# Altium PCB RFID_CC1101_869MHz.PcbDoc (part 1 of 2)
Units mil, origin at the board's own origin, x right, y up, seen from the top; angles counter-clockwise.
Board outline 1670 x 2720 mil, 4 copper layers (Top Layer, GND Plane, POWER Plane, Bottom Layer), stack 16.312 mil thick; 110 components, 80 nets, 353 pads, 256 vias.
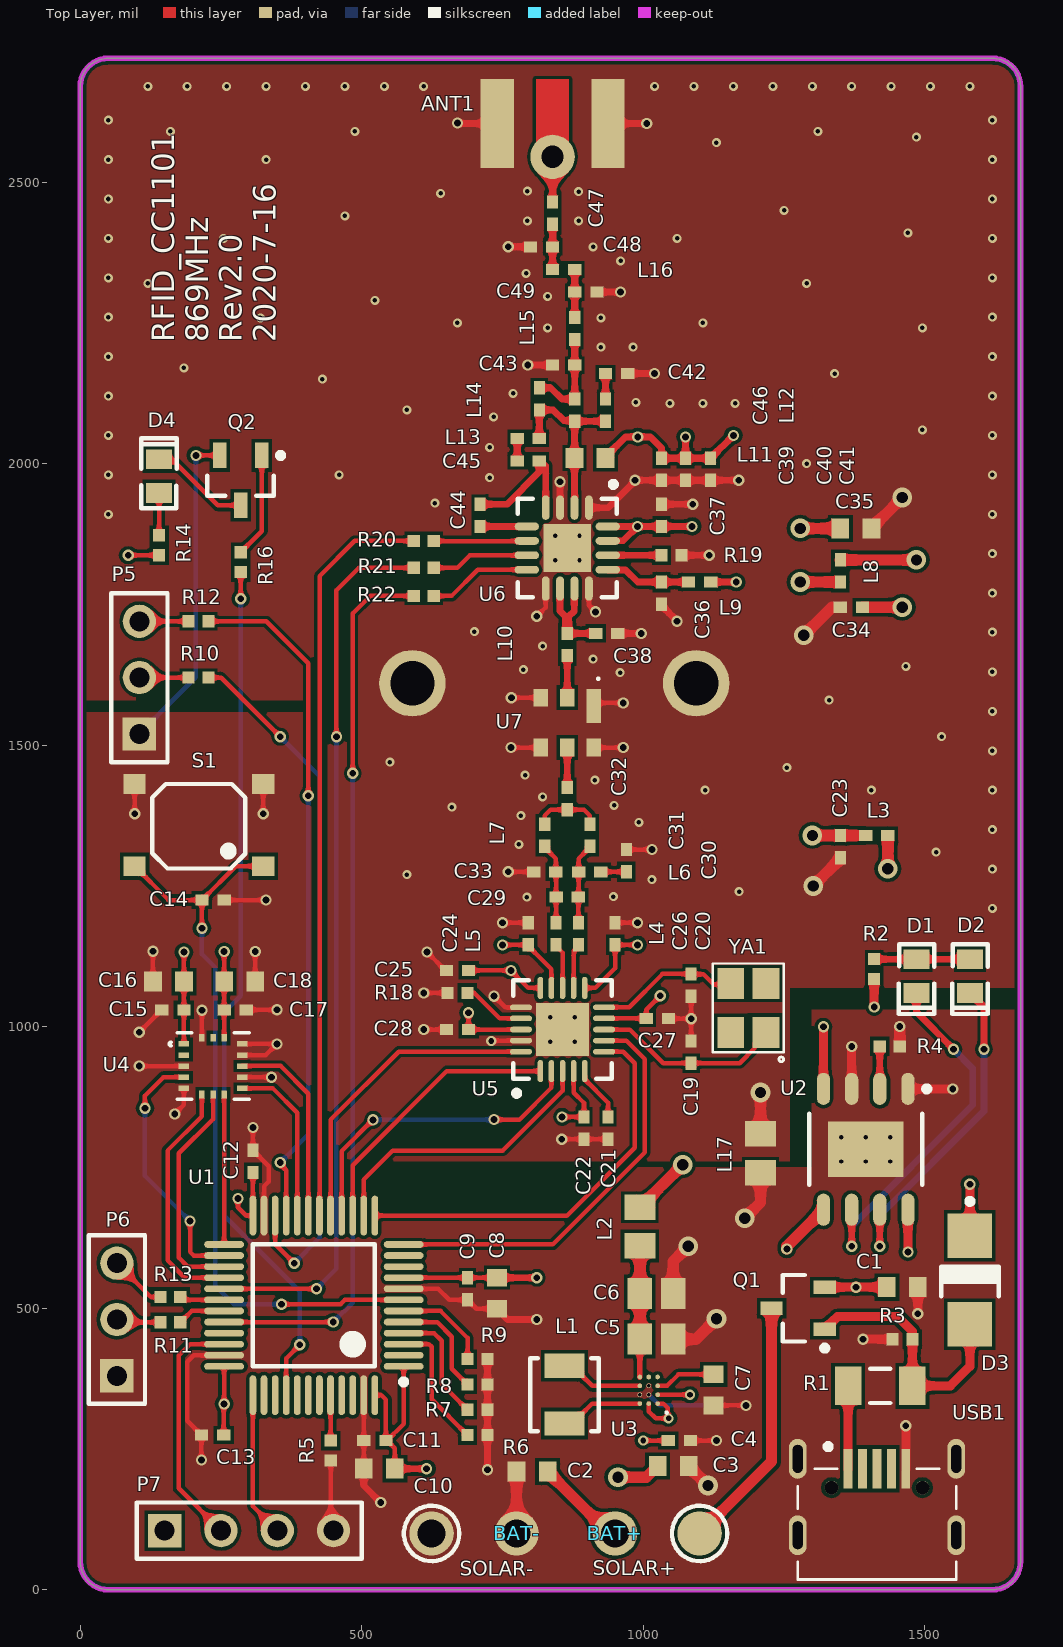
[diagram p0: Top Layer view]
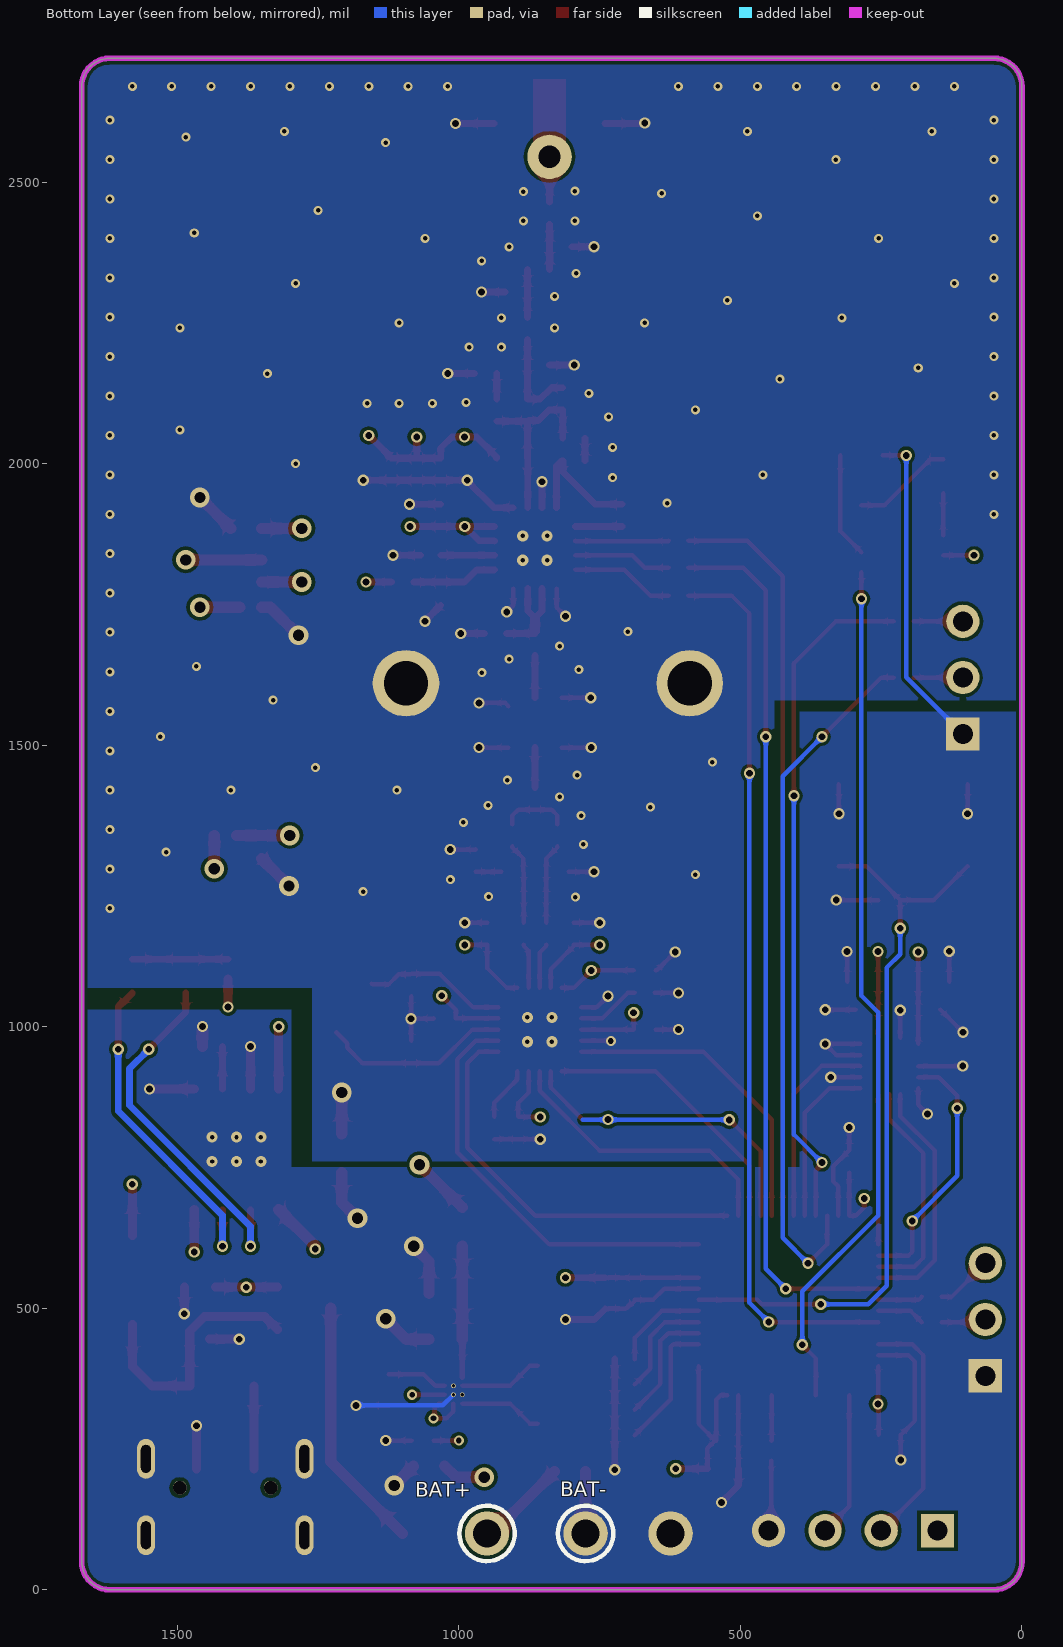
[diagram p1: Bottom Layer view, seen from below]
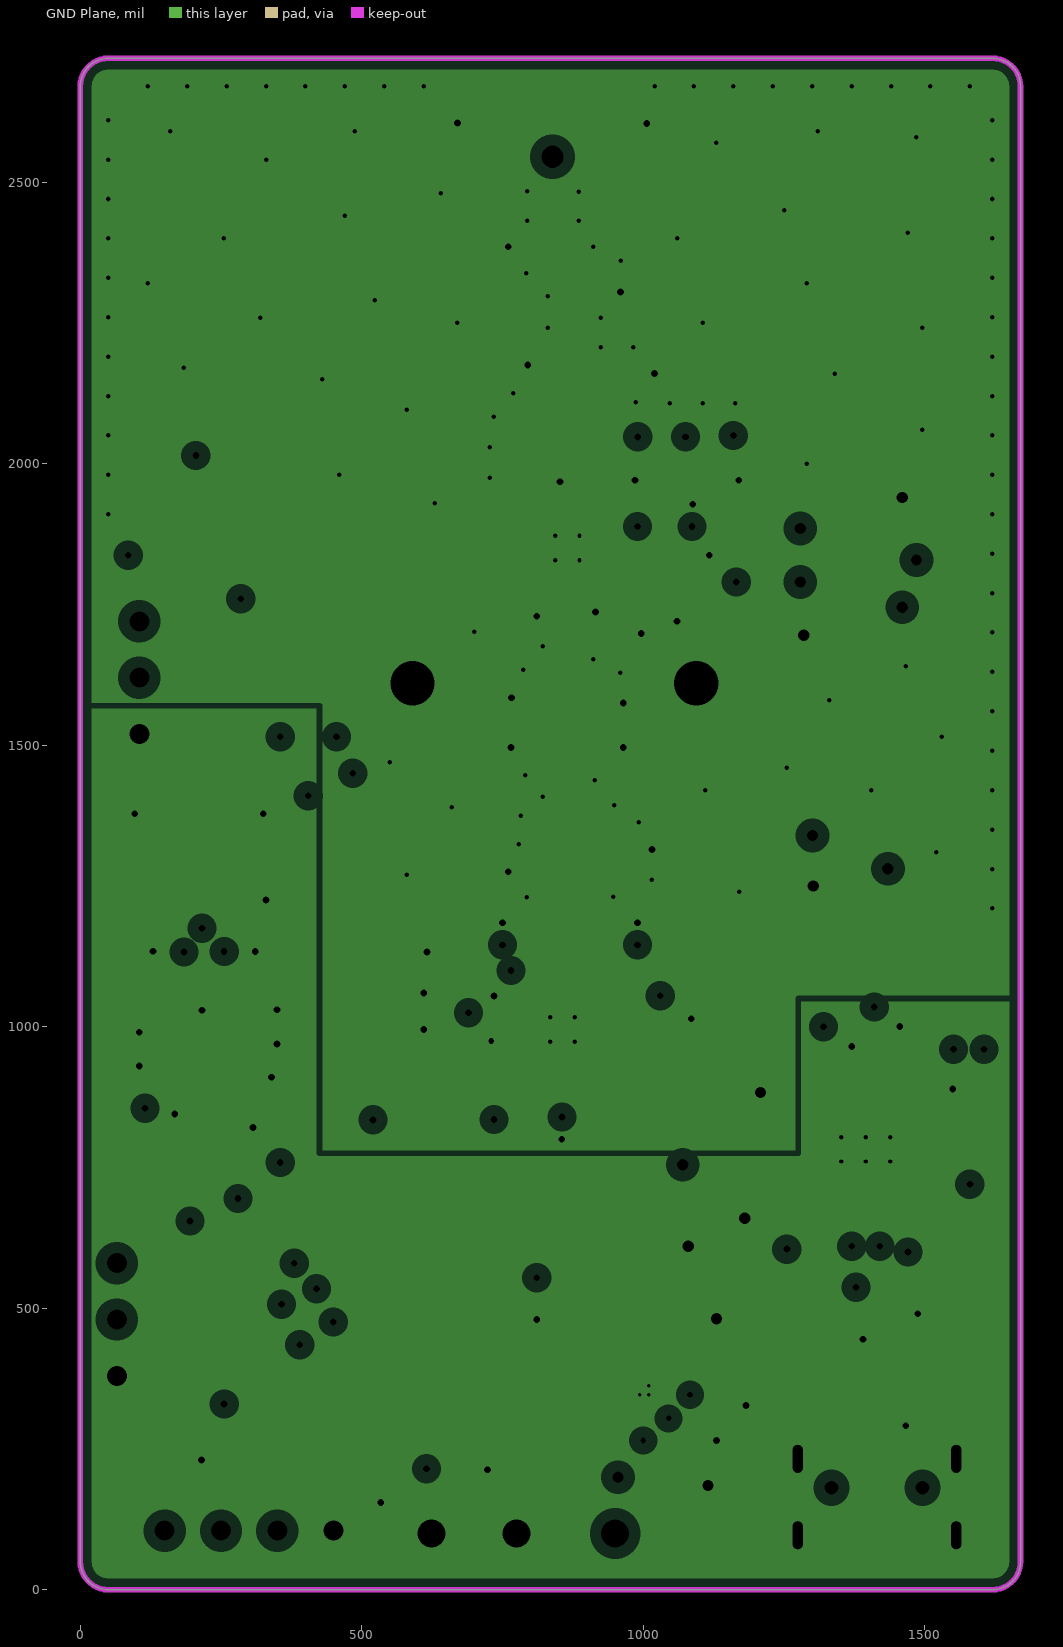
[diagram p2: GND Plane, clearances drawn from the general rule]
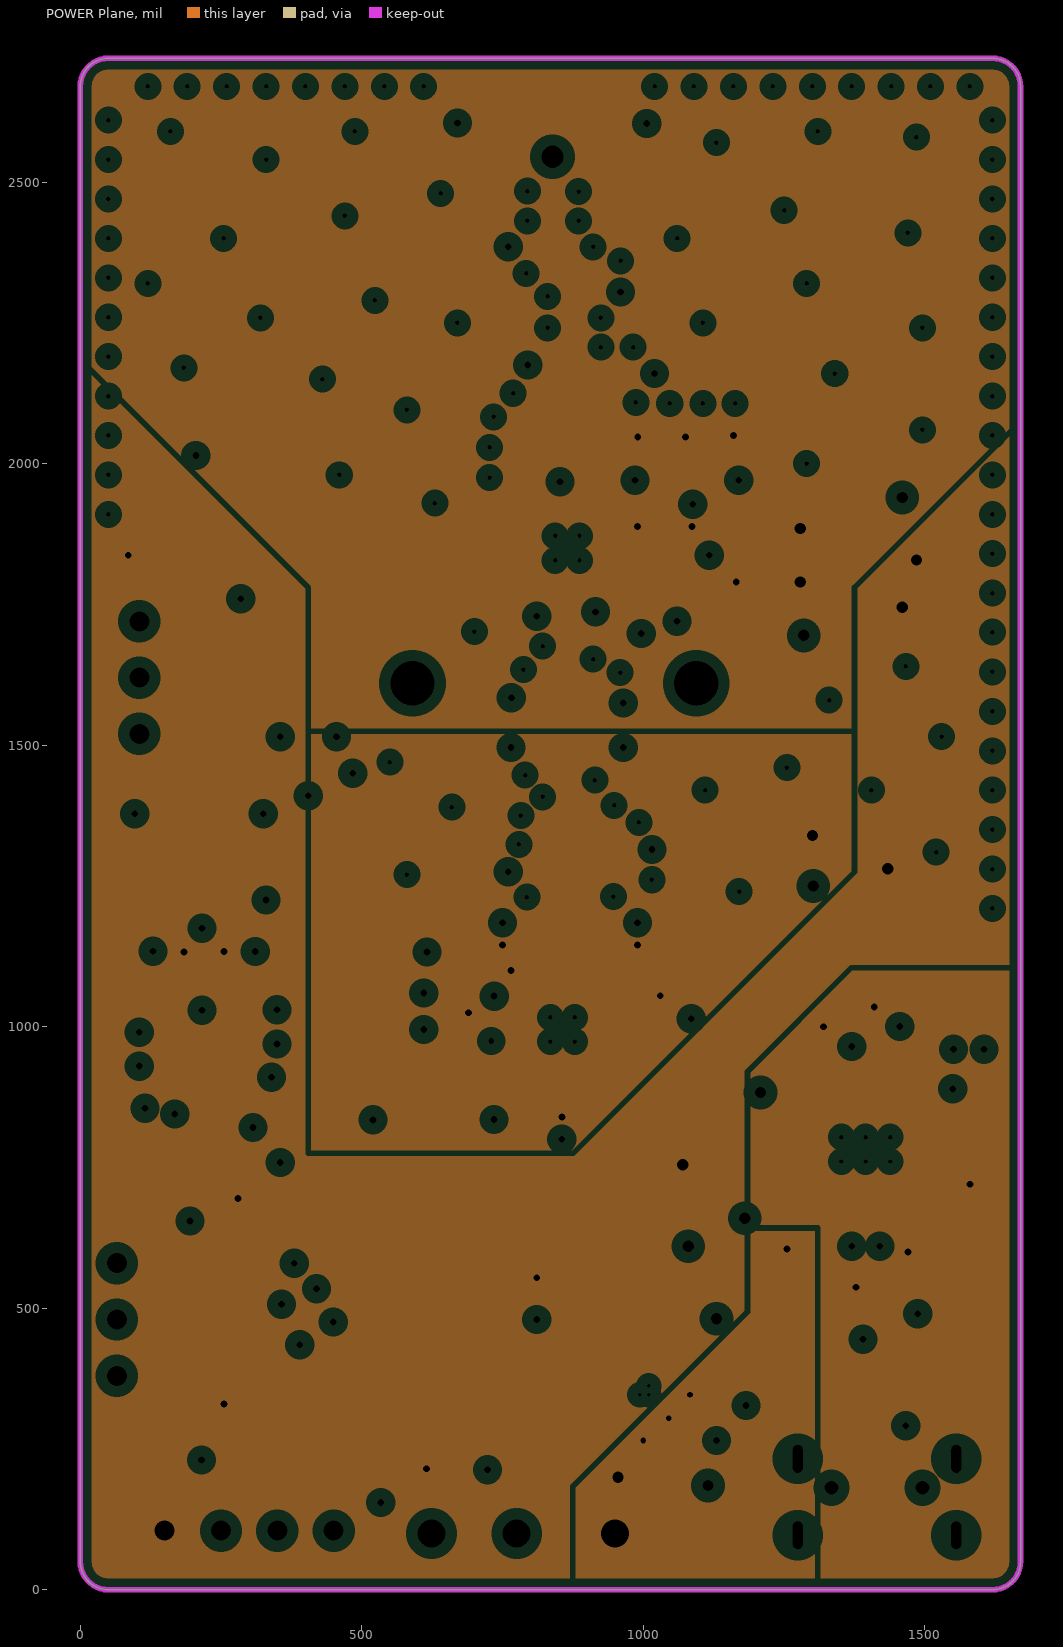
[diagram p3: POWER Plane, clearances drawn from the general rule]

## Layer stack, top to bottom
Top Solder: solder mask 0.4, Solder Resist, Dk 3.5
Top Layer: signal copper 1.3779
Dielectric 1: core 4, Core-009, Dk 4.5
GND Plane: plane copper 1.3779, net (Multiple Nets)
Dielectric 3: prepreg 2.8, PP-006, Dk 4.1
POWER Plane: plane copper 1.3779, net (Multiple Nets)
Dielectric 2: core 4, Core-009, Dk 4.5
Bottom Layer: signal copper 1.3779
Bottom Solder: solder mask 0.4, Solder Resist, Dk 3.5

## Board outline
0,50 0,2670 cw(c50,2670) 50,2720 1620,2720 cw(c1620,2670) 1670,2670 1670,50 cw(c1620,50) 1620,0 50,0 cw(c50,50)

## Design rules (kind name [scope] priority, off if disabled: settings)
Clearance Clearance_6mil [(IsPad and InComponent('U1')) or (IsPad and InComponent('U3')) or (IsPad and InComponent('U4')) or (IsPad and InComponent('U5')) or (IsPad and InComponent('U6')) or (IsPad and InComponent('USB1'))] p1: gap=6 ignorepadtopadclearanceinfootprint=TRUE
Clearance [All] p2: gap=6 ignorepadtopadclearanceinfootprint=TRUE
HoleToHoleClearance [All] p1: gap=8 allowstackedmicrovias=TRUE
MinimumSolderMaskSliver [All] p1: minsoldermaskwidth=1
PlaneClearance [All] p1: clearance=20
PlaneConnect [All] p1: planeconnectstyle=Direct reliefexpansion=20 reliefentries=4 reliefconductorwidth=10 reliefairgap=10
PolygonConnect [All] p1: connectstyle=Direct reliefconductorwidth=10 reliefentries=4 polygonreliefangle="90 Angle" airgapwidth=10
RoutingVias [All] p1: holewidth=12 width=20 viastyle="Through Hole" minholewidth=6 minwidth=14 maxholewidth=28 maxwidth=50
SilkToSilkClearance [All] p1: silktosilkclearance=8
SilkToSolderMaskClearance [IsPad] p1: minsilkscreentomaskgap=3 clearancetoexposedcopper=TRUE
SolderMaskExpansion [All] p1: expansion=4
UnRoutedNet [All] p1: checkbadconnections=TRUE
Width Width_PW [InNet('BAT+') or InNet('SOLAR+') or InNet('VCC') or InNet('VCC_3V3') or InNet('VCC_CC1101') or InNet('VCC_CC1190')] p1: maxlimit=50 minlimit=8 preferedwidth=20
Width [All] p2: maxlimit=50 minlimit=8 preferedwidth=8
23 further rules are at their usual default settings.

## Classes and differential pairs
component class Power: BAT+ BAT- C1 C2 C3 C4 C5 C6 C7 D1 D2 D3 L1 L17 Q1 R1 R2 R3 R4 SOLAR+ SOLAR- U2 U3 USB1
component class MEMS&RF: ANT1 C15 C16 C17 C18 C19 C20 C21 C22 C23 C24 C25 C26 C27 C28 C29 C30 C31 C32 C33 C34 C35 C36 C37 C38 C39 C40 C41 C42 C43 C44 C45 C46 C47 C48 C49 L3 L4 L5 L6 L7 L8 L9 L10 L11 L12 L13 L14 L15 L16 R18 R19 U4 U5 U6 U7 YA1
component class MCU: C8 C9 C10 C11 C12 C13 C14 D4 P5 P6 P7 Q2 R5 R6 R7 R8 R9 R10 R11 R12 R13 R14 R16 R20 R21 R22 S1 U1

## Components (designator, comment, footprint, x,y, rotation, side; value= is the part's Value field where it differs from the comment)
ANT1 "ANT" SMB-xg 838.9,2545 r90 top
BAT+ "BAT+" surface_pad#1 950,100 r180 top
BAT- "BAT-" SURFACE_PAD 775,100 r180 top
C1 "10uF" 1608[0603] 1460,537.4 r180 top
C2 "10uF" 1608[0603] 802.56,210 r0 top
C3 "10uF" 1608[0603] 1052.99,220 r180 top
C4 "100nF" 0402 1064.21,265 r180 top
C5 "22uF" C0805 1023.46,445 r180 top
C6 "22uF" C0805 1023.46,526.26 r180 top
C7 "1uF" 1608[0603] 1125,355 r90 top
C8 "1uF" 1608[0603] 739.96,526.65 r90 top
C9 "100nF" 0402 687.8,534.53 r90 top
C10 "10uF" 1608[0603] 531.14,215 r0 top
C11 "100nF" 0402 523.27,265 r180 top
C12 "100nF" 0402 306.73,760.63 r90 top
C13 "100nF" 0402 235,275 r180 top
C14 "100nF" 0402 235.86,1225 r0 top
C15 "100nF" 0402 164.5,1030 r0 top
C16 "1uF" 1608[0603] 156.63,1080 r180 top
C17 "100nF" 0402 275.24,1030 r0 top
C18 "1uF" 1608[0603] 283.11,1080 r180 top
C19 "12pF" 0402 1085,955 r270 top
C20 "15pF" 0402 1085,1074 r90 top
C21 "100nF" 0402 937.32,820 r90 top
C22 "100nF" 0402 894.68,820 r90 top
C23 "1uF" 0402 1350,1320 r270 top
C24 "100nF" 0402 795.75,1165 r90 top
C25 "100nF" 0402 670,1100 r180 top
C26 "100nF" 0402 950,1165 r90 top
C27 "100nF" 0402 1025,1014.68 r0 top
C28 "100nF" 0402 670,995 r180 top
C29 "1pF" 0402 865,1230 r0 top
C30 "100pF" 0402 970,1295 r90 top
C31 "1.5pF" 0402 905,1340 r90 top
C32 "47pF" 0402 865,1405 r90 top
C33 "1.5pF" 0402 825,1275 r0 top
C34 "220pF" 0402 1369.69,1745 r0 top
C35 "10uF" 1608[0603] 1377.56,1885 r180 top
C36 "18pF" 0402 1032.28,1770 r270 top
C37 "33pF" 0402 1032.28,1908.07 r270 top
C38 "2.7pF" 0402 935,1698.5 r180 top
C39 "1uF" 0402 1032.28,1990 r90 top
C40 "47pF" 0402 1075,1990 r90 top
C41 "1nF" 0402 1119.69,1990 r90 top
C42 "5.6pF" 0402 952.6,2160 r180 top
C43 "5.6pF" 0402 858.58,2175 r0 top
C44 "12pF" 0402 710,1908.07 r90 top
C45 "12pF" 0402 795.75,2005 r0 top
C46 "2.2pF" 0402 878.27,2095 r270 top
C47 "47pF" 0402 838.9,2445 r270 top
C48 "9.1pF" 0402 819.21,2385 r0 top
C49 "15pF" 0402 897.95,2304.69 r180 top
D1 "Green" 0603/K 1485,1120 r270 top
D2 "Red" 0603/K 1580,1120 r270 top
D3 "SS24S" ONSC-SMA-2-403D-02_V 1580,550 r270 top
D4 "Green" 0603/K 140,1947.68 r90 top
L1 "2.2μH ±20% at 100kHz" INDP3230X10N 860,346.42 r90 top value="2.2μH ±20% at 100k"
L2 "220 Ω@100MHz" RESC2012X07N 993.94,645 r90 top
L3 "1000Ω@100MHz" 0402 1414.69,1339.69 r180 top
L4 "12nH" 0402 885,1165 r90 top
L5 "12nH" 0402 845,1165 r90 top
L6 "18nH" 0402 905,1275 r0 top
L7 "18nH" 0402 825,1340 r90 top
L8 "11nH" 0402 1350,1809.37 r270 top
L9 "1.5nH" 0402 1100,1789.68 r0 top
L10 "8.2nH" 0402 865,1678.82 r90 top
L11 "15nH" 1608[0603] 905.35,2010 r0 top
L12 "1.5nH" 0402 932.91,2095 r270 top
L13 "10nH" 0402 795.75,2045 r0 top
L14 "2.2nH" 0402 815.43,2115 r270 top
L15 "2.2nH" 0402 878.27,2240 r270 top
L16 "4.1nH" 0402 858.58,2344.69 r0 top
L17 "220 Ω@100MHz" RESC2012X07N 1208,775 r90 top
P5 "Header 3" HDR1X3 105,1520 r90 top
P6 "Header 3" HDR1X3 65,380 r90 top
P7 "Header 4" HDR1X4 150,105 r0 top
Q1 "Si2301CDS" SOT95P237X112-3N 1275,500 r180 top
Q2 "MMS8050-L" ? 285,1970.31 r270 top
R1 "0.4" RESC3216X07N 1420.91,362.17 r0 top
R2 "1k" RESC1005X04N 1410,1102.28 r90 top
R3 "10k" RESC1005X04N 1460.28,445 r0 top
R4 "1.2k" RESC1005X04N 1437.72,965 r180 top
R5 "10k" RESC1005X04N 445,247.28 r270 top
R6 "10k" RESC1005X04N 705.51,274.69 r180 top
R7 "10k" RESC1005X04N 705.51,319.69 r180 top
R8 "10k" RESC1005X04N 705.51,364.69 r180 top
R9 "10k" RESC1005X04N 705.51,409.69 r180 top
R10 "33" RESC1005X04N 210,1620 r180 top
R11 "33" RESC1005X04N 160,475 r180 top
R12 "33" RESC1005X04N 210,1720 r0 top
R13 "33" RESC1005X04N 160,520 r0 top
R14 "10k" RESC1005X04N 140,1855 r270 top
R16 "1k" RESC1005X04N 285,1825 r90 top
R18 "56k" RESC1005X04N 670,1060 r0 top
R19 "3.3k" RESC1005X04N 1050,1837.2 r0 top
R20 "10k" RESC1005X04N 610,1862.8 r0 top
R21 "10k" RESC1005X04N 610,1815 r180 top
R22 "10k" RESC1005X04N 610,1765 r180 top
S1 "DPST-4" DPST 325,1285 r180 top
SOLAR+ "SOLAR+" surface_pad#2 1100,100 r0 top
SOLAR- "SOLAR-" surface_pad#1 624,100 r0 top
U1 "STM32L051C8T6" STM-LQFP48_N 415,505 r180 top
U2 "TP4056" ESOP-9N 1395,782.28 r270 top
U3 "MP28160" CSP-12 1009.68,354.29 r180 top
U4 "ADXL362BCCZ" LGA_CC-16-4 235.86,930 r0 top
U5 "CC1101" QFN50P400X400X100_HS-21N 856.61,995 r90 top
U6 "CC1190" QFN65P400X400X100_HS-17N 865,1850 r270 top
U7 "B39871B3725U410" DCC6C 865,1540 r270 top
USB1 "Micro-USB" USB_Micro_5P4J 1415,18 r270 top
YA1 "27MHz" XTAL-SMT-4P 1218,990 r90 top

## Footprints (in the part's own frame and the unit in brackets; to place one, negate y for a bottom-side part, rotate by r counter-clockwise, add the part's x,y. Pads: shape width x height; smd on the part's side, far side on the other; paste and mask are expansions set on the pad)
0402 [mm] "Chip Capacitor, Body 1.0x0.5mm, IPC High Density"
  rect 0.6x0.5 smd: 1(-0.5,0) 2(0.5,0)
  body extent -0.55,-0.3 0.55,0.3, height 1.3
0603/K [mil]
  rect 35x46 smd: A(0,0) K(60,0)
  silkscreen extent -27,-31 97,31
1608[0603] [mm] "Chip Capacitor, Body 1.6x0.8mm, IPC High Density"
  rect 0.8x0.9 smd: 1(-0.7,0) 2(0.7,0)
  body extent -0.87,-0.48 0.87,0.48, height 1.3
C0805 [mm] "Chip Capacitor, Body 2.0x1.3mm, IPC High Density"
  rect 1.1x1.4 smd: 1(-0.75,0) 2(0.75,0)
  body extent -1.1,-0.72 1.1,0.72, height 1.4
CSP-12 [mm] "CSP-12, 12-Leads, Body 1.40x1.80mmx0.63mm, Pitch 0.40mm"
  round 0.21 smd: A1(-0.4,0.6) A2(0,0.6) A3(0.4,0.6) B1(-0.4,0.2) C1(-0.4,-0.2) C3(0.4,-0.2) D1(-0.4,-0.6) D2(0,-0.6) D3(0.4,-0.6)
  round 0.21 hole 0.152: B2(0,0.2) B3(0.4,0.2) C2(0,-0.2)
  silkscreen extent -0.85,0.96 -0.76,1.05, body extent -0.7,-0.9 0.7,0.9, height 0.63
DCC6C [mm] "DCC6C,  6-Leads, Pitch 1.20mm,  Body 3.00x3.00mm,  IPC Medium Density, For B39871B3725U410"
  rect 1.55x0.65 smd: 1(-0.75,1.2)
  rect 0.8x0.65 smd: 2(-1.125,0) 3(-1.125,-1.2) 4(1.125,-1.2) 5(1.125,0) 6(1.125,1.2)
  silkscreen extent -2.03,1.35 -1.93,1.45, body extent -1.55,-1.55 1.55,1.55, height 1.23
DPST [mm]
  rect 1x0.9 smd: 1(0,0) 2(5.8,0) 3(0,-3.7) 4(5.8,-3.7)
  silkscreen extent 0.81,-3.71 5,0.1
ESOP-9N [mm] "ESOP, 8-Leads, Body 4.90x3.90mm, Pitch 1.27mm, Thermal Pad 3.41x2.52mm, IPC Medium Density, For TP4056"
  oval 1.45x0.6 smd: 1(-2.725,1.905) 2(-2.725,0.635) 3(-2.725,-0.635) 4(-2.725,-1.905) 5(2.725,-1.905) 6(2.725,-0.635) 7(2.725,0.635) 8(2.725,1.905)
  rect 2.52x3.41 smd: 9(0,0)
  silkscreen extent -2.85,-2.55 1.6,2.88, body extent -3,-2.55 3,2.55, height 1.75
HDR1X3 [mm] "Connector; Header; 3 Position"
  rect 1.5x1.5 hole 0.9: 1(0,0)
  round 1.5 hole 0.9: 2(2.54,0) 3(5.08,0)
  silkscreen extent -1.27,-1.27 6.35,1.27
HDR1X4 [mm] "Connector; Header; 4 Position"
  rect 1.5x1.5 hole 0.9: 1(0,0)
  round 1.5 hole 0.9: 2(2.54,0) 3(5.08,0) 4(7.62,0)
  silkscreen extent -1.27,-1.27 8.89,1.27
INDP3230X10N [mm] "Precision Wire Wound Inductor, 2-Leads, Body 3.20x3.00mm, IPC Medium Density, For SPM3010T-2R2M-LR"
  rect 1.1x1.8 smd: 1(-1.3,0) 2(1.3,0)
  silkscreen extent -1.65,-1.55 1.65,1.55, body extent -1.7,-1.5 1.7,1.5, height 1.1
LGA_CC-16-4 [mm]
  rect 0.475x0.25 smd: 1(-1.313,1) 2(-1.313,0.5) 3(-1.313,0) 4(-1.313,-0.5) 5(-1.313,-1) 9(1.313,-1) 10(1.313,-0.5) 11(1.313,0) 12(1.313,0.5) 13(1.313,1)
  rect 0.25x0.35 smd: 6(-0.5,-1.275) 7(0,-1.275) 8(0.5,-1.275) 14(0.5,1.275) 15(0,1.275) 16(-0.5,1.275)
  silkscreen extent -1.98,-1.5 1.63,1.5, body extent 0,0 0.25,0.25, height 0.25
ONSC-SMA-2-403D-02_V [mm] "Molded, 2-Leads, Body 4.57x2.92mm"
  rect 2x2 smd: 1(-2,0) 2(2,0)
  silkscreen extent -3.67,-1.3 0.74,1.3, body extent -2.16,-1.3 2.16,1.3, height 2.2
QFN50P400X400X100_HS-21N [mm] "QFN, 20-Leads, Body 4.00x4.00mm, Pitch 0.50mm, Thermal Pad 2.40x2.40mm, IPC Medium Density"
  oval 1x0.25 smd: 1(-1.875,1) 2(-1.875,0.5) 3(-1.875,0) 4(-1.875,-0.5) 5(-1.875,-1) 11(1.875,-1) 12(1.875,-0.5) 13(1.875,0) 14(1.875,0.5) 15(1.875,1)
  oval 0.25x1 smd: 6(-1,-1.875) 7(-0.5,-1.875) 8(0,-1.875) 9(0.5,-1.875) 10(1,-1.875) 16(1,1.875) 17(0.5,1.875) 18(0,1.875) 19(-0.5,1.875) 20(-1,1.875)
  rect 2.4x2.4 smd: 21(0,0)
  silkscreen extent -3,-2.22 2.22,2.22, body extent -2.08,-2.08 2.08,2.08, height 1
QFN65P400X400X100_HS-17N [mm] "QFN, 16-Leads, Body 4.00x4.00mm, Pitch 0.65mm, Thermal Pad 2.16x2.16mm, IPC Medium Density"
  oval 1.1x0.35 smd: 1(-1.825,0.975) 2(-1.825,0.325) 3(-1.825,-0.325) 4(-1.825,-0.975) 9(1.825,-0.975) 10(1.825,-0.325) 11(1.825,0.325) 12(1.825,0.975)
  oval 0.35x1.1 smd: 5(-0.975,-1.825) 6(-0.325,-1.825) 7(0.325,-1.825) 8(0.975,-1.825) 13(0.975,1.825) 14(0.325,1.825) 15(-0.325,1.825) 16(-0.975,1.825)
  rect 2.16x2.16 smd: 17(0,0)
  silkscreen extent -3,-2.22 2.22,2.22, body extent -2.08,-2.08 2.08,2.08, height 1
RESC1005X04N [mm] "Chip Resistor, 2-Leads, Body 1.00x0.50mm, IPC Medium Density"
  rect 0.55x0.55 smd: 1(-0.45,0) 2(0.45,0)
  body extent -0.53,-0.28 0.53,0.28, height 0.4
RESC2012X07N [mm] "Chip Resistor, 2-Leads, Body 2.00x1.25mm, IPC Medium Density"
  rect 1.15x1.4 smd: 1(-0.875,0) 2(0.875,0)
  body extent -1.1,-0.7 1.1,0.7, height 0.65
RESC3216X07N [mm] "Chip Resistor, 2-Leads, Body 3.20x1.60mm, IPC Medium Density"
  rect 1.2x1.75 smd: 1(-1.45,0) 2(1.45,0)
  silkscreen extent -0.45,-0.77 0.45,0.77, body extent -1.7,-0.87 1.7,0.87, height 0.65
SMB-xg [mm] "Connector; SMB Straight"
  round 2 hole 1: 1(0,0)
  rect 4x1.5 smd: 2(1.5,2.5) 2(1.5,-2.5)
  Top Layer region: 0,-0.75 3.5,-0.75 3.5,0.75 0,0.75
SOT95P237X112-3N [mm] "SOT23, 3-Leads, Body 2.92x2.37mm, Pitch 0.95mm, IPC Medium Density"
  rect 1x0.6 smd: 1(-1.2,0.95) 2(-1.2,-0.95) 3(1.2,0)
  silkscreen extent -1.33,-1.5 0.7,1.92, body extent -1.32,-1.52 1.32,1.52, height 1.12
STM-LQFP48_N [mm] "QFP, 48-Leads, Body 7x7mm, Pitch 0.5mm, IPC Medium Density"
  oval 1.8x0.3 smd: 1(-4.05,2.75) 2(-4.05,2.25) 3(-4.05,1.75) 4(-4.05,1.25) 5(-4.05,0.75) 6(-4.05,0.25) 7(-4.05,-0.25) 8(-4.05,-0.75) 9(-4.05,-1.25) 10(-4.05,-1.75) 11(-4.05,-2.25) 12(-4.05,-2.75) 25(4.05,-2.75) 26(4.05,-2.25) 27(4.05,-1.75) 28(4.05,-1.25) 29(4.05,-0.75) 30(4.05,-0.25) 31(4.05,0.25) 32(4.05,0.75) 33(4.05,1.25) 34(4.05,1.75) 35(4.05,2.25) 36(4.05,2.75)
  oval 0.3x1.8 smd: 13(-2.75,-4.05) 14(-2.25,-4.05) 15(-1.75,-4.05) 16(-1.25,-4.05) 17(-0.75,-4.05) 18(-0.25,-4.05) 19(0.25,-4.05) 20(0.75,-4.05) 21(1.25,-4.05) 22(1.75,-4.05) 23(2.25,-4.05) 24(2.75,-4.05) 37(2.75,4.05) 38(2.25,4.05) 39(1.75,4.05) 40(1.25,4.05) 41(0.75,4.05) 42(0.25,4.05) 43(-0.25,4.05) 44(-0.75,4.05) 45(-1.25,4.05) 46(-1.75,4.05) 47(-2.25,4.05) 48(-2.75,4.05)
  silkscreen extent -4.18,-2.75 2.75,3.57, body extent -3.5,-3.5 3.5,3.5, height 1.6
surface_pad#1 [mm]
  round 2 hole 1.27: 1(0,0)
surface_pad#2 [mm]
  round 2 smd: 1(0,0)
  silkscreen extent -1.25,-1.25 1.25,1.25
SURFACE_PAD [mm]
  round 2 hole 1.27: 1(0,0)
USB_Micro_5P4J [mm] "MK5P, Base, DIP, With locating column, roll edge."
  oval 1.8x0.8 hole 0.45 slot 1.25 at 0 deg: 0(-5.45,3.575) 0(-5.45,-3.575) 0(-2,3.575) 0(-2,-3.575)
  rect 1.8x0.4 smd: 1(-5,-1.3) 2(-5,-0.65) 3(-5,0) 4(-5,0.65) 5(-5,1.3)
  round 0.62 hole 0.62 unplated: MH1(-4.15,2.05) MH2(-4.15,-2.05)
  silkscreen extent -6.12,-3.57 0,3.57
XTAL-SMT-4P [mm] "3225, 3.2mmx2.5mm"
  rect 1.4x1.2 smd: 1(0,0) 2(2.2,0) 3(2.2,1.6) 4(0,1.6)
  silkscreen extent -1.32,-0.8 3.1,2.4
? [mm] "SOT23, 3-Leads, Body 2.9x1.3mm, Pitch 0.95mm, Lead Span 2.4mm, IPC Medium Density"
  rect 1.15x0.6 smd: B(-1.125,0.95) C(1.125,0) E(-1.125,-0.95)
  silkscreen extent -1.25,-1.5 0.7,1.93, body extent -0.7,-1.5 0.7,1.5, height 1.14

## Part data
ANT1: "Antenna,GPS_ANT_IPX"
BAT+ BAT- SOLAR+ SOLAR-: library part SURFACE_PAD, "PAD"
C1 C2 C3 C10: library part C1608X5R1A106K080AC, "Capacitor (0603,X5R,10uF,DC 10V,±10%) TDK", LatestRevisionDate=29-May-2009, LatestRevisionNote="IPC-7351 Footprint Added.", PackageDescription="Chip Capacitor", PackageReference=C0603, Published=8-Jun-2000, Publisher="Altium Limited"
C4 C9 C11 C12 C13 C14: library part CGA2B2X5R1A104K050BA, "Capacitor (0402,X5R,100nF,DC 10V,±10%) TDK", LatestRevisionDate=29-May-2009, LatestRevisionNote="IPC-7351 Footprint Added.", PackageDescription="Chip Capacitor", PackageReference=C0402, Published=8-Jun-2000, Publisher="Altium Limited"
C5 C6: library part C2012X5R1A226K125AB, "Capacitor (0805,X5R,22uF,DC 10V,±10%) TDK", LatestRevisionDate=29-May-2009, LatestRevisionNote="IPC-7351 Footprint Added.", PackageDescription="Chip Capacitor", PackageReference=C0805, Published=8-Jun-2000, Publisher="Altium Limited"
C7 C8 C16 C18: library part CGA3E2X5R1A105K080AA, "Capacitor (0603,X5R,1uF,DC 10V,+/-10%) TDK", LatestRevisionDate=29-May-2009, LatestRevisionNote="IPC-7351 Footprint Added.", PackageDescription="Chip Capacitor", PackageReference=C0603, Published=8-Jun-2000, Publisher="Altium Limited"
C15 C17: library part C1005X7R1H104K050BE, "Capacitor (0402,X7R,100nF,DC 50V,±10%) TDK", LatestRevisionDate=29-May-2009, LatestRevisionNote="IPC-7351 Footprint Added.", PackageDescription="Chip Capacitor", PackageReference=C0402, Published=8-Jun-2000, Publisher="Altium Limited"
C19 C44 C45: library part GRM1555C1H120JZ01D, "Capacitor (0402,NP0,12pF,DC 50V,±5%) Murata", LatestRevisionDate=29-May-2009, LatestRevisionNote="IPC-7351 Footprint Added.", PackageDescription="Chip Capacitor", PackageReference=C0402, Published=8-Jun-2000, Publisher="Altium Limited"
C20 C49: library part GRM1555C1H150JZ01D, "Capacitor (0402,NP0,15pF,DC 50V,±5%) Murata", LatestRevisionDate=29-May-2009, LatestRevisionNote="IPC-7351 Footprint Added.", PackageDescription="Chip Capacitor", PackageReference=C0402, Published=8-Jun-2000, Publisher="Altium Limited"
C21 C22 C24 C25 C26 C27 C28: library part GRM155R71A104KA01D, "Capacitor (0402,X5R,100nF,DC 10V,±10%) Murata", LatestRevisionDate=29-May-2009, LatestRevisionNote="IPC-7351 Footprint Added.", PackageDescription="Chip Capacitor", PackageReference=C0402, Published=8-Jun-2000, Publisher="Altium Limited"
C23 C39: library part GRM155R60J105KE19D, "Capacitor (0402,X5R,1uF,DC 6.3V,±10%) Murata", LatestRevisionDate=29-May-2009, LatestRevisionNote="IPC-7351 Footprint Added.", PackageDescription="Chip Capacitor", PackageReference=C0402, Published=8-Jun-2000, Publisher="Altium Limited"
C29: library part GRM1555C1H1R0CZ01D, "Capacitor (0402,NP0,1pF,DC 50V,±0.25pF) Murata", LatestRevisionDate=29-May-2009, LatestRevisionNote="IPC-7351 Footprint Added.", PackageDescription="Chip Capacitor", PackageReference=C0402, Published=8-Jun-2000, Publisher="Altium Limited"
C30: library part GRM1555C1H101JZ01D, "Capacitor (0402,NP0,100pF,DC 50V,±5%) Murata", LatestRevisionDate=29-May-2009, LatestRevisionNote="IPC-7351 Footprint Added.", PackageDescription="Chip Capacitor", PackageReference=C0402, Published=8-Jun-2000, Publisher="Altium Limited"
C31 C33: library part GRM1555C1H1R5CZ01D, "Capacitor (0402,NP0,1.5pF,DC 50V,±0.25pF) Murata", LatestRevisionDate=29-May-2009, LatestRevisionNote="IPC-7351 Footprint Added.", PackageDescription="Chip Capacitor", PackageReference=C0402, Published=8-Jun-2000, Publisher="Altium Limited"
C32 C40 C47: library part GRM1555C1H470JZ01D, "Capacitor (0402,NP0,47pF,DC 50V,±5%) Murata", LatestRevisionDate=29-May-2009, LatestRevisionNote="IPC-7351 Footprint Added.", PackageDescription="Chip Capacitor", PackageReference=C0402, Published=8-Jun-2000, Publisher="Altium Limited"
C34: library part GRM1555C1H221JA01D, "Capacitor (0402,NP0,220pF,DC 50V,±5%) Murata", LatestRevisionDate=29-May-2009, LatestRevisionNote="IPC-7351 Footprint Added.", PackageDescription="Chip Capacitor", PackageReference=C0402, Published=8-Jun-2000, Publisher="Altium Limited"
C35: library part GRM188R60G106ME47D, "Capacitor (0603,X5R,10uF,DC 4V,+/-20%) Murata", LatestRevisionDate=29-May-2009, LatestRevisionNote="IPC-7351 Footprint Added.", PackageDescription="Chip Capacitor", PackageReference=C0603, Published=8-Jun-2000, Publisher="Altium Limited"
C36: library part GRM1555C1H180JZ01D, "Capacitor (0402,NP0,18pF,DC 25V,±5%) Murata", LatestRevisionDate=29-May-2009, LatestRevisionNote="IPC-7351 Footprint Added.", PackageDescription="Chip Capacitor", PackageReference=C0402, Published=8-Jun-2000, Publisher="Altium Limited"
C37: library part GRM1555C1H330JZ01D, "Capacitor (0402,NP0,33pF,DC 50V,±5%) Murata", LatestRevisionDate=29-May-2009, LatestRevisionNote="IPC-7351 Footprint Added.", PackageDescription="Chip Capacitor", PackageReference=C0402, Published=8-Jun-2000, Publisher="Altium Limited"
C38: library part GRM1555C1H2R7CZ01D, "Capacitor (0402,NP0,2.7pF,DC 50V,±0.25pF) Murata", LatestRevisionDate=29-May-2009, LatestRevisionNote="IPC-7351 Footprint Added.", PackageDescription="Chip Capacitor", PackageReference=C0402, Published=8-Jun-2000, Publisher="Altium Limited"
C41: library part GRM1555C1H102JA01D, "Capacitor (0402,NP0,1nF,DC 50V,±5%) Murata", LatestRevisionDate=29-May-2009, LatestRevisionNote="IPC-7351 Footprint Added.", PackageDescription="Chip Capacitor", PackageReference=C0402, Published=8-Jun-2000, Publisher="Altium Limited"
C42 C43: library part GRM1555C1H5R6CZ01D, "Capacitor (0402,NP0,5.6pF,DC 50V,±0.25pF) Murata", LatestRevisionDate=29-May-2009, LatestRevisionNote="IPC-7351 Footprint Added.", PackageDescription="Chip Capacitor", PackageReference=C0402, Published=8-Jun-2000, Publisher="Altium Limited"
C46: library part GRM1555C1H2R2CZ01, "Capacitor (0402,NP0,2.2pF,DC 50V,±0.25pF) Murata", LatestRevisionDate=29-May-2009, LatestRevisionNote="IPC-7351 Footprint Added.", PackageDescription="Chip Capacitor", PackageReference=C0402, Published=8-Jun-2000, Publisher="Altium Limited"
C48: library part GRM1555C1H9R1CA01D, "Capacitor (0402,NP0,9.1pF,DC 50V,±0.25pF) Murata", LatestRevisionDate=29-May-2009, LatestRevisionNote="IPC-7351 Footprint Added.", PackageDescription="Chip Capacitor", PackageReference=C0402, Published=8-Jun-2000, Publisher="Altium Limited"
D1 D4: library part TLMG1100-GS08, "Standard 0603 SMD LED, Green, 2.1V,-40 °C to +100 °C", LatestRevisionDate=17-Jul-2002, LatestRevisionNote="Re-released for DXP Platform.", PackageDescription="SM LED; 2 Flat Leads", PackageReference=0603, PackageVersion=Feb-2002, Published=8-Jun-2000, Publisher="Altium Limited", Valid=Green
D2: library part TLMS1100-GS08, "Standard 0603 SMD LED, Red, 2.1V,-40 °C to +100 °C", LatestRevisionDate=17-Jul-2002, LatestRevisionNote="Re-released for DXP Platform.", PackageDescription="SM LED; 2 Flat Leads", PackageReference=0603, PackageVersion=Feb-2002, Published=8-Jun-2000, Publisher="Altium Limited", Valid=Red
D3: "Schottky Power Rectifier, 2-Pin SMA, VRRM=40V , VF=0.517V at IF=2.0A , Pb-Free, Tape and Reel", Manufacturer="On Semiconductor", Supplier Part Number 1=SS16T3GOSTR-ND, ComponentLink1Description="Manufacturer URL", ComponentLink1URL=http://www.onsemi.com/, ComponentLink2Description=Datasheet, ComponentLink2URL=http://www.onsemi.cn/pub_link/Collateral/SS16-D.PDF, ComponentLink3Description="Package Specification", ComponentLink3URL=http://www.onsemi.com/pub_link/Collateral/403D-02.PDF, Configuration=Single, DatasheetVersion="Rev. 7", IFSM Max (A)=40, Mounting Technology="Surface Mount", PackageDescription="2-Pin Small Molded Package, J-Bend Lead, Body 2.605 x 4.315 mm", PackageReference=SMA-2-403D-02, PackageVersion="Rev. G, 07/2012", Packing="Tape and Reel", PartNumber=SS24S, RoHS=TRUE, Supplier 1=Digi-Key, Supplier 2=Digi-Key, Supplier 3=Digi-Key, Supplier 4=Farnell, Supplier 5=Farnell, Supplier 6=Newark, Supplier 7=Newark, Supplier 8=Mouser, Supplier Part Number 2=SS16T3GOSCT-ND, Supplier Part Number 3=SS16T3GOSDKR-ND, Supplier Part Number 4=2317421, Supplier Part Number 5=1900107, Supplier Part Number 6=98H0976, Supplier Part Number 7=10N9613, Supplier Part Number 8=863-SS16T3G
L1: library part SPM3010T-2R2M-LR, "inductor_commercial_power, 2.2μH ±20% at 100kHz, 2.6A, 3.2mm*3.0mm, -40～125°C", PackageDescription="inductor, 2-Leads, Body 2.00x1.25mm, IPC Medium Density", PackageReference=3230
L2 L17: library part FBMH2012HM221-T, "220Ω, 2 A, 0805/2012 (EIA/JIS)", PackageDescription="Bead Inductor, 2-Leads, Body 2.00x1.25mm, IPC Medium Density", PackageReference=0805
L3: library part BLM15HG102SN1D, "Inductor,EMI filter bead, 1000Ω@100MHz 250mA, 0402 1k ohms Tape GHz Band Gen Use, Murata", LatestRevisionDate=29-May-2009, LatestRevisionNote="IPC-7351 Footprint Added.", PackageDescription=Inductor, PackageReference=0402, Published=8-Jun-2000, Publisher="Altium Limited"
L4 L5: library part LQW15AN12NJ00D, "Inductor, 12n, 0402, ±5%, wire-wound type Murata", LatestRevisionDate=29-May-2009, LatestRevisionNote="IPC-7351 Footprint Added.", PackageDescription=Inductor, PackageReference=0402, Published=8-Jun-2000, Publisher="Altium Limited"
L6 L7: library part LQW15AN18NJ00D, "Inductor, 18n, 0402, ±5%, wire-wound type Murata", LatestRevisionDate=29-May-2009, LatestRevisionNote="IPC-7351 Footprint Added.", PackageDescription=Inductor, PackageReference=0402, Published=8-Jun-2000, Publisher="Altium Limited"
L8: library part LQW15AN11NJ00, "Inductor, 11n, 0402, ±5%, wire-wound type Murata", LatestRevisionDate=29-May-2009, LatestRevisionNote="IPC-7351 Footprint Added.", PackageDescription=Inductor, PackageReference=0402, Published=8-Jun-2000, Publisher="Altium Limited"
L9 L12: library part LQG15HS1N5S02D, "Inductor, 1n5, 0402, Monolithic type, +/-0.3 nH Murata", LatestRevisionDate=29-May-2009, LatestRevisionNote="IPC-7351 Footprint Added.", PackageDescription=Inductor, PackageReference=0402, Published=8-Jun-2000, Publisher="Altium Limited"
L10: library part LQG15HS8N2J02D, "Inductor, 8n2, 0402, ±5% / Murata", LatestRevisionDate=29-May-2009, LatestRevisionNote="IPC-7351 Footprint Added.", PackageDescription=Inductor, PackageReference=0402, Published=8-Jun-2000, Publisher="Altium Limited"
L11: library part LQW18AN15NJ00, "Inductor, 15n, 0603, ±5%, wire-wound type Murata", LatestRevisionDate=29-May-2009, LatestRevisionNote="IPC-7351 Footprint Added.", PackageDescription=Inductor, PackageReference=0603, Published=8-Jun-2000, Publisher="Altium Limited"
L13: library part LQW15AN10NJ00D, "Inductor, 10n, 0402, ±5%, wire-wound type Murata", LatestRevisionDate=29-May-2009, LatestRevisionNote="IPC-7351 Footprint Added.", PackageDescription=Inductor, PackageReference=0402, Published=8-Jun-2000, Publisher="Altium Limited"
L14 L15: library part LQW15AN2N2C10D, "Inductor, 2n2, 0402, wire-wound type, +/- 0.2 nH Murata", LatestRevisionDate=29-May-2009, LatestRevisionNote="IPC-7351 Footprint Added.", PackageDescription=Inductor, PackageReference=0402, Published=8-Jun-2000, Publisher="Altium Limited"
L16: library part LQW15AN4N1C00, "Inductor, 4n1, 0402, +/-0.2nH, wire-wound type Murata", LatestRevisionDate=29-May-2009, LatestRevisionNote="IPC-7351 Footprint Added.", PackageDescription=Inductor, PackageReference=0402, Published=8-Jun-2000, Publisher="Altium Limited"
P5 P6: "Header, 3-Pin", LatestRevisionDate=17-Jul-2002, LatestRevisionNote="Re-released for DXP Platform.", Publisher="Altium Limited"
P7: "Header, 4-Pin", LatestRevisionDate=17-Jul-2002, LatestRevisionNote="Re-released for DXP Platform.", Publisher="Altium Limited"
Q1: "P-Channel MOSFET,VDS=-20V,VGS=8V,ID=3.1A,VGS(th)Min=0.4V,SOT-23", LatestRevisionDate=17-Jul-2002, LatestRevisionNote="Re-released for DXP Platform.", PackageDescription="SOT23, 3-Leads, Body 2.92x2.37mm, Pitch 0.95mm, IPC Medium Density", PackageReference=SOT23, PackageVersion=1995/1996, Published=8-Jun-2000, Publisher="Altium Limited"
Q2: "NPN Silicon  Plastic-Encapsulate  Transistor , MCC , Range:120-200", Code_JEDEC=TO-226-AA, LatestRevisionDate=17-Jul-2002, LatestRevisionNote="Re-released for DXP Platform.", PackageDescription="TO, Flat Index; 3 In-Line, Axial Leads; Body Dia. 4.8mm; Leads 0.55 x 0.51 mm (max)", PackageReference=TO-226-AA, Published=8-Jun-2000, Publisher="Altium Limited"
R1: library part PE1206FRF470R4L, "Resistor 1206(3216) 0.4Ω ±1% 1W AUTOMOTIVE GRADEPE_L series", PackageDescription="Chip Resistor, 2-Leads, Body 3.20x1.60mm, IPC Medium Density", PackageReference=1206
R2 R16: library part RC0402FR-071KL, "Resistor 0402(1005) 1kΩ ±1%", PackageDescription="Chip Resistor, 2-Leads, Body 1.00x0.50mm, IPC Medium Density", PackageReference=0402
R3 R5 R6 R7 R8 R9 R14 R20 R21 R22: library part RC0402FR-0710KL, "Resistor 0402(1005) 10kΩ ±1%", PackageDescription="Chip Resistor, 2-Leads, Body 1.00x0.50mm, IPC Medium Density", PackageReference=0402
R4: library part RC0402FR-071K2L, "Resistor 0402(1005) 1.2kΩ ±1%", PackageDescription="Chip Resistor, 2-Leads, Body 1.00x0.50mm, IPC Medium Density", PackageReference=0402
R10 R11 R12 R13: library part RC0402FR-0733RL, "Resistor 0402(1005) 33Ω ±1%", PackageDescription="Chip Resistor, 2-Leads, Body 1.00x0.50mm, IPC Medium Density", PackageReference=0402
R18: library part RK73H1ETTP5602F, "Resistor, 56k ohms, 0402, ±1% Koa", PackageDescription="Chip Resistor, 2-Leads, Body 1.00x0.50mm, IPC Medium Density", PackageReference=0402
R19: library part RK73H1ETTP3301F, "Resistor, 3.3k ohms, 0402, ±1% Koa", PackageDescription="Chip Resistor, 2-Leads, Body 1.00x0.50mm, IPC Medium Density", PackageReference=0402
S1: library part CX-G001, "5.2*5.2轻触开关", LatestRevisionDate=17-Jul-2002, LatestRevisionNote="Re-released for DXP Platform.", PackageDescription="Switch; 4 Leads", PackageReference=DPST-4, Published=24-Mar-1999, Publisher="Altium Limited"
U1: "Access line ultra-low-power 32-bit MCU Arm?-based Cortex?-M0+, 64 KB Flash, 8 KB SRAM,2 KB EEPROM, 38 fast I/Os, 48-pin LQFP, -40 to 125 degC, Tray", I/Os (High Current)=37, Operating Frequency(F) (Processor speed) (MHz)=32, Supplier Part Number 1=497-11517-ND, Supply Voltage(Vcc) min (V)=2, A/D Converter=2x12-bit, ComponentLink1Description="Manufacturer URL", ComponentLink1URL=http://www.st.com/web/en/home.html, ComponentLink2Description=Datasheet, ComponentLink2URL=http://www.st.com/st-web-ui/static/active/en/resource/technical/document/datasheet/CD00161566.pdf, ComponentLink3Description="Package Specification", ComponentLink3URL=http://www.st.com/st-web-ui/static/active/en/resource/technical/document/datasheet/DM00058181.pdf, Core="ARM Cortex-M0+", DatasheetVersion="Rev. 16", FLASH Size (Prog) (kB)=64, Internal RAM Size (kB)=20, Mounting Technology="Surface Mount", PackageDescription="48-Pin Low Profile Quad Flat Package, 7 x 7 mm Body, 0.5 mm Pitch", PackageReference=LQFP48, PackageVersion="Rev. 6, 06/2013", Packing=Tray, PartNumber=STM32L051C8T6, Supplier 1=Digi-Key, Supplier 2=Farnell, Supplier 3=Newark, Supplier 4=Mouser, Supplier Part Number 2=1899017, Supplier Part Number 3=72T2644, Supplier Part Number 4=511-STM32L051C8T6
U2: "1A线性锂离子电池充电器"
U3: "5.5V/0.5A High-EfficiencyIntegrated Buck-Boost Converterwith 3.3V FixedOutput in 1.4x1.8mm CSP Package", Manufacturer_Part_Number=CSP-12, Iout=500mA, Vendor=MPS, Vin="2.5V to 5.5V", Vout=3.3V
U4: "ADXL362, LGA, CC-16-4."
U5: "Low-Power Sub-1GHz RF Transceiver"
U6: "850– 950MHzRFFrontEnd"
U7: "SAW RF filter,Low-loss RF filter for remote control receivers,Center frequency 69 MHz,Usable pass band 2MHz"
USB1: library part USB/Micro-AB, "Receptacle,Micro 5脚贴片 不带定位柱"
YA1: library part NX3225GA, "Crystal, 27.000000MHz, 10.0pF, 50 ohms max, NDK", Valid=27MHz

## Free pads (board coordinates)
  round 118.11 hole 78.74: 1(590,1610) 2(1093.94,1610)

## Via types
v1: diameter 16, hole 8, Top Layer to Bottom Layer, tented both sides, 122 vias
v2: diameter 20, hole 12, Top Layer to Bottom Layer, tented both sides, 100 vias
v3: diameter 35, hole 20, Top Layer to Bottom Layer, tented both sides, 16 vias
v4: diameter 19.68, hole 7.87, Top Layer to Bottom Layer, tented both sides, 14 vias
v5: diameter 18, hole 10, Top Layer to Bottom Layer, tented both sides, 4 vias

## Nets (pads, with @x,y where several pads share a name; then routed paths per layer and width w, separated by ;. In a path a pad name is that pad's centre, name@x,y a point inside that pad or via, vN(x,y) a via of type N, cw(c..) or ccw(c..) an arc to the next point about the centre after c; other vN are vias at no path point)
AGND: ANT1.2 C19.1 C20.1 C21.1 C22.1 C23.2 C24.2 C25.2 C26.2 C27.2 C28.2 C30.2 C33.1 C34.1 C35.1 C36.2 C37.1 C38.1 C39.1 C40.1 C41.1 C42.1 C43.1 C48.1 C49.1 L17.2 pad.1 pad.2 R18.1 R19.2 U5.16 U5.19 U5.21 U6.1 U6.3 U6.9 U6.12 U6.17 U7.1 U7.3 U7.4 U7.6 | length 2073
  Top Layer w8: v2(610,995) C28.2 ; v2(610,1060) R18.1 ; v2(615.76,1132.59) 648.35,1100 C25.2 ; v5(730,974.68) 730.63,975.32 U5.19 ; v2(735.06,1054.32) 755,1034.37 U5.16 ; v2(750,1184.69) C24.2 ; v2(760,1275) C33.1 ; v2(765,1495.71) U7.4 ; v2(765.71,1584.29) U7.3 ; v2(810.79,1728.87) 826.41,1744.5 826.41,1777.95 U6.9 ; v2(855.32,800.32) C22.1 C21.1 ; U6.12 903.39,1748.35 v2(915,1736.73) ; U7.6 v2(964.29,1495.71) ; U7.1 917.72,1575 v2(964.29,1575) ; C26.2 v2(989.69,1184.69) ; C30.2@970.31,1315 C30.2 v2(1015.31,1314.69) ; C36.2@1032.28,1748.35 C36.2 ; C27.2 1044.95,1014.42 1084.74,1014.42 v2(1085,1014.16) ; v2(1060,1720) v2@1060,1720.63 ; C19.1 v2(1085,1014.16) ; C20.1 v2(1085,1014.16)
  Top Layer w12: v2(670,2605) 670.94,2604.06 ANT1.2@740.47,2604.06 ; v2(760,2385) C48.1 ; v2(795,2175) C43.1 ; U6.3 v2(852.2,1967.8) ; U6.1 937.97,1921.85 985.32,1969.19 v2(985.32,1970.31) C39.1 C40.1 C41.1 v2(1169.68,1970.31) ; C49.1 v2(959.68,2304.69) ; ANT1.2@937.32,2604.06 v2(1005.94,2604.06) ; C38.1 v2(996.5,1698.5) ; C42.1 v2(1020,2160) ; C36.2@1032.28,1748.35 v2@1060,1720.63 ; C37.1 v2(1087.76,1927.76) ; R19.2 v2(1117.2,1837.2) ; C23.2@1350,1298.35 C23.2
  Top Layer w20: L17.2 v3(1208,883) ; v3(1285,1695) 1335,1745 C34.1 ; v3(1301.65,1250) C23.2@1350,1298.35 ; C35.1 v3(1460,1939.88)
  other v1: 1620,1210 793.15,1230.32 947,1231 1170,1240 1015.31,1261 580,1270 1620,1280 1520,1310 779,1324 1620,1350 992,1363 782.8,1375 660,1390 948,1393 821,1408 1110,1420 1405.12,1420 1620,1420 914,1438 790,1447 1255,1460 550,1470 1620,1490 1530,1515 1620,1560 1330,1580 959,1629 1620,1630 787,1634 1466.18,1640 911,1653 821,1676 1620,1700.88 700,1701.53 1620,1770 1620,1840 50,1910 1620,1910 630,1930 727,1975 50,1980 460,1980 1620,1980 1290,2000 727,2029 50,2050 1620,2050 1495.71,2060 734,2083 580,2095.31 1047,2107 1106,2107 1163,2107 987,2109 50,2120 1620,2120 769,2125 430,2150 1340,2160 184.19,2170 50,2190 1620,2190 924.69,2207 982,2207 830,2241 1495.71,2241 670,2250 1106,2250 320,2259 924.69,2259 50,2260 1620,2260 523.27,2290 830,2297 120,2320 1290,2320 50,2330 1620,2330 792,2338 959.68,2360 911,2385 50,2400 254.68,2400 1060,2400 1620,2400 1470,2410 794,2431 885.32,2431 470,2440 1250,2450 50,2470 1620,2470 640,2480 885.32,2483 794,2484 50,2540 330.32,2540 1620,2540 1130,2570 1485,2580 160,2590 487.8,2590 1310,2590 50,2610 1620,2610 120,2670 190,2670 260,2670 330,2670 400,2670 470,2670 540,2670 610,2670 1020,2670 1090,2670 1160,2670 1230,2670 1300.31,2670 1370,2670 1440,2670 1510,2670 1580,2670
  other v4: 834.96,973.35 878.27,973.35 834.96,1016.65 878.27,1016.65 843.35,1828.35 886.65,1828.35 843.35,1871.65 886.65,1871.65
BAT+: BAT+.1 C2.2 C3.2 C4.2 U2.5 U3.A1 U3.A2 U3.B1 | length 537.9
  Top Layer w8: v5(1000,265) C4.2 ; U3.A2 1009.74,330.62 1009.74,316.58 1021.91,304.4 v5(1045,304.4) 1043.09,306.32 1043.09,323.18 1035.6,330.67 U3.A1 ; U3.B1 v5(1083,346.42)
  Top Layer w20: C2.2 940.12,100 BAT+.1 ; v3(955,200) 1005.43,200 C3.2 ; v2(1255,605) 1255,610 U2.5
GDO0: U1.13 U5.6 | length 724.8
  Top Layer w8: U1.13 864.45,664.45 985,785 985,935 964.37,955.63 U5.6
GDO2: U1.14 U5.3 | length 517.4
  Top Layer w8: U1.14 503.58,728.58 555,780 750.31,780 856.61,886.3 U5.3
GND: BAT-.1 C1.1 C2.1 C3.1 C4.1 C5.1 C6.1 C7.1 C8.1 C9.1 C10.1 C11.2 C12.2 C13.2 C14.2 C15.1 C16.2 C17.2 C18.1 L17.1 P5.1 P6.1 P7.4 Q2.E R3.1 R4.1 R5.2 R6.1 R7.1 R8.1 R9.1 S1.3 S1.4 SOLAR-.1 U1.8 U1.23 U1.35 U1.47 U2.1 U2.3 U2.9 U3.B2 U3.B3 U3.C2 U4.3 U4.5 U4.10 U4.12 U4.13 U4.16 USB1.0 USB1.5 | length 3643.4
  Top Layer w8: v2(96.65,1378.35) S1.4 ; v2(104.82,990) C15.1 ; v2(105,930) U4.3 ; C16.2 v2(129.07,1134.07) ; v2(167.91,845) 184.19,861.27 U4.5 ; v2(205.39,2014.61) Q2.E ; v2(215.31,230.31) C13.2 190,300.31 190,405 201.42,416.42 U1.35 ; U4.16 v2(216.17,1029.14) ; C14.2 v2(330,1225) ; U4.10 v2(339.69,910.31) ; U4.12 329.69,949.69 v2(349.38,969.38) U4.13 ; C17.2 v2(349.38,1030) ; v2(306.73,821) C12.2 335,752.05 335,725 326.42,716.42 U1.23 ; C18.1 v2(310.67,1133.4) ; v2(325,1378.35) S1.3 ; R5.2 445,110 P7.4 ; C10.1 C11.2 U1.47 ; U1.8 635.47,534.53 655.16,514.84 C9.1 687.8,512.87 693.64,507.03 695.61,507.03 703.54,499.09 C8.1 ; C4.1 v2(1130,265) ; C7.1 v2(1182.56,327.44)
  Top Layer w12: C10.1 503.58,184.97 v2(533.55,155) ; v2(723.23,213.23) R6.1 R7.1 R8.1 R9.1 ; C8.1 759.06,480 v2(810.79,480)
  Top Layer w16: U2.3 v2(1370,965) ; v2(1390,445) R3.1 ; USB1.5 v2(1466.18,291.18) ; U2.1 v2(1549.57,889.57) ; v2(1487.56,490) C1.1
  Top Layer w20: BAT-.1 C2.1 ; C5.1 1093.74,445 v3(1130,481.26) ; C6.1 1052.99,582.99 v3(1080,610) ; C3.1 1080.55,219.45 v3(1115,185) ; v3(1180,660) 1208,688 L17.1 ; R4.1 v2(1455.43,1000.43)
  Bottom Layer w8: P5.1 205.39,1620.39 v2(205.39,2014.61) ; U3.B2 1028.68,327.42 v2@1182.54,327.42
  other v4: 1351.69,760.63 1395,760.63 1438.31,760.63 1351.69,803.94 1395,803.94 1438.31,803.94
HGM: R20.2 U6.6 | length 165.6
  Top Layer w8: R20.2 627.94,1862.57 792.93,1862.57 U6.6
INT1: U1.19 U4.11 | length 354.7
  Top Layer w8: U4.11 287.85,930.31 355.87,930.31 405.16,881.02 U1.19
INT2: U1.20 U4.9 | length 298.6
  Top Layer w8: U4.9 287.85,890.31 342.25,890.31 385.47,847.09 U1.20
LED_GREEN: R16.1 U1.40 | length 1539.7
  Top Layer w8: v2(285,1760) R16.1 ; U1.40 365.79,410.79 v2(390,435)
  Bottom Layer w8: v2(285,1760) 285,1055 255.55,1025.55 255.55,664.45 390,530 v2(390,435)
LNA_EN: R21.1 U6.7 | length 174.6
  Top Layer w8: R21.1 670,1815 692.2,1837.2 U6.7
LPUART1_RX: R10.1 U1.22 | length 1252
  Top Layer w8: R10.1 250.24,1620 v2(355.24,1515) ; U1.22 346.23,664.32 346.23,613.77 v2(380,580)
  Bottom Layer w8: v2(355.24,1515) 355.24,1514.76 425,1445 425,625 v2(380,580)
LPUART1_TX: R12.2 U1.21 | length 1214.1
  Top Layer w8: R12.2 330.32,1720 405,1645.32 v2(405,1410) ; v2(355.24,758.66) 355.24,755.41 365.79,744.86 U1.21
  Bottom Layer w8: v2(355.24,758.66) 405,808.43 v2(405,1410)
NetANT1_1: ANT1.1 C47.1 | length 80.3
  Top Layer w12: C47.1 ANT1.1
NetC5_2: C5.2 C6.2 L2.1 U3.D3 | length 232.6
  Top Layer w10: U3.D3 C5.2
  Top Layer w20: C5.2 C6.2 L2.1
NetC7_2: C7.2 U3.C1 | length 107.8
  Top Layer w8: U3.C1 1042.17,362.17 1062.44,382.44 C7.2@1124.88,382.44
NetC14_1: C14.1 S1.1 S1.2 U1.7 | length 1324.3
  Top Layer w8: S1.2 156.65,1225 C14.1 ; v2(216.17,1175) C14.1 ; S1.1 276.17,1285 C14.1 ; v2(357.27,507.03) 462.35,507.03 470.16,514.84 U1.7
  Bottom Layer w8: v2(216.17,1175) 216.17,1128.83 240,1105 240,540 272.97,507.03 v2(357.27,507.03)
NetC19_2: C19.2 U5.8 YA1.1 | length 339.6
  Top Layer w8: U5.8 975.91,995 1035.6,935.31 C19.2 1171.3,935.31 1198.38,962.39 1198.38,970.38 YA1.1
NetC20_2: C20.2 U5.10 YA1.3 | length 257.6
  Top Layer w8: U5.10 930.62,1034.56 974.87,1034.56 1034,1093.69 C20.2 1085.53,1093.16 1106.84,1093.16 1125,1075 1153.39,1075 YA1.3
NetC21_2: C21.2 U5.5 | length 98.6
  Top Layer w8: U5.5 895.98,906.42 937.32,865.08 C21.2
NetC29_1: C29.1 C33.2 L5.2 L7.1 | length 144.2
  Top Layer w8: L7.1 825,1318.35 844.69,1298.66 C33.2 845,1274.69 845,1230.32 C29.1 845.16,1229.84 845.16,1184.84 L5.2
NetC29_2: C29.2 C31.1 L4.2 L6.1 | length 144.2
  Top Layer w8: L4.2 884.84,1184.84 884.84,1229.84 C29.2 885,1230.32 885,1274.69 L6.1 885.32,1298.66 905,1318.35 C31.1
NetC30_1: C30.1 L6.2 | length 45.4
  Top Layer w8: L6.2 924.84,1275.16 969.84,1275.16 C30.1
NetC31_2: C31.2 C32.1 L7.2 | length 119.2
  Top Layer w8: L7.2 825,1375 835.32,1385.32 C32.1 894.68,1385.32 905,1375 C31.2
NetC32_2: C32.2 U7.5 | length 71
  Top Layer w12: C32.2 U7.5
NetC36_1: C36.1 L9.1 U6.13 | length 152.5
  Top Layer w12: U6.13 937.19,1811.27 968.6,1811.27 990.19,1789.68 C36.1 L9.1
NetC38_2: C38.2 L10.2 U6.10 U6.11 | length 220.2
  Top Layer w12: U6.10 852.2,1738.09 861.98,1728.32 861.98,1701.53 L10.2 ; U6.11 877.55,1777.91 877.55,1738.5 867.37,1728.32 867.37,1700.88 L10.2 ; C38.2 L10.2
NetC42_2: C42.2 L12.1 | length 45.3
  Top Layer w12: L12.1 C42.2
NetC43_2: C43.2 C46.1 L14.1 L15.2 | length 176.7
  Top Layer w12: L14.1 835.63,2134.69 855.63,2114.69 C46.1 C43.2 L15.2
NetC44_1: C44.1 U6.5 | length 83.1
  Top Layer w12: C44.1 U6.5
NetC44_2: C44.2 C45.2 U6.4 | length 237.8
  Top Layer w12: C44.2 757.76,1927.76 815,1985 815,2004.57 C45.2 817.4,2005 826.61,1995.79 U6.4
NetC45_1: C45.1 L13.1 | length 40
  Top Layer w12: C45.1 L13.1
NetC46_2: C46.2 L11.1 L12.2 L13.2 L14.2 U6.2 | length 329.6
  Top Layer w12: L13.2 L14.2 840,2095.31 858.81,2076.5 876.61,2076.5 C46.2@878.03,2075.08 ; U6.2 L11.1 878.03,2010.24 C46.2@878.03,2075.08 ; L12.2 C46.2 C46.2@878.03,2075.08
NetC47_2: C47.2 C48.2 L16.1 | length 80.6
  Top Layer w12: L16.1 C48.2 C47.2
NetC49_2: C49.2 L15.1 L16.2 | length 85
  Top Layer w12: L15.1 C49.2 L16.2
NetD1_A: D1.A D2.A R2.2 | length 170
  Top Layer w12: R2.2 D1.A D2.A
NetD1_K: D1.K U2.6 | length 645.5
  Top Layer w12: v2(1370,610) U2.6 ; D1.K 1485,1025.75 v2(1550.75,960)
  Bottom Layer w12: v2(1370,610) 1370,645.43 1585,860.43 1585,925.75 v2(1550.75,960)
NetD2_K: D2.K U2.7 | length 602
  Top Layer w12: v2(1420,610) U2.7 ; D2.K 1605,1035 v2(1605,960)
  Bottom Layer w12: v2(1420,610) 1420,665 1605,850 v2(1605,960)
NetD3_2: D3.2 Q1.1 R1.2 R3.2 | length 463.5
  Top Layer w16: Q1.1 1344.65,485 1452,485 1477.99,459.01 R3.2 R1.2 1545.43,362.17 1580,396.73 D3.2
NetD4_A: D4.A R14.1 | length 75
  Top Layer w8: R14.1 D4.A
NetD4_K: D4.K Q2.C | length 178.8
  Top Layer w8: D4.K 162.32,2007.68 243.98,1926.02 Q2.C
NetL1_1: L1.1 U3.A3 | length 148.6
  Top Layer w8: L1.1 873.78,295.24 909.21,330.67 U3.A3
NetL1_2: L1.2 U3.C3 | length 148.6
  Top Layer w8: L1.2 873.78,397.6 909.21,362.17 U3.C3
NetL4_1: L4.1 U5.12 | length 80.1
  Top Layer w8: U5.12 876.3,1134.65 885,1143.35 L4.1
NetL5_1: L5.1 U5.13 | length 81.3
  Top Layer w8: L5.1 845,1143.35 856.61,1131.73 U5.13
NetL10_1: L10.1 U7.2 | length 74.8
  Top Layer w12: U7.2 L10.1
NetP5_2: P5.2 R10.2 | length 87.3
  Top Layer w8: P5.2 R10.2
NetP5_3: P5.3 R12.1 | length 87.3
  Top Layer w8: P5.3 R12.1
NetP6_2: P6.2 R11.2 | length 79.4
  Top Layer w8: P6.2 70,475 R11.2
NetP6_3: P6.3 R13.1 | length 102.1
  Top Layer w8: P6.3 125,520 R13.1
NetQ2_B: Q2.B R16.2 | length 187.4
  Top Layer w8: R16.2 322.4,1880.12 Q2.B
NetR1_1: R1.1 USB1.1 | length 147.3
  Top Layer w16: USB1.1 R1.1
NetR4_2: R4.2 U2.2 | length 75.4
  Top Layer w12: U2.2 R4.2
NetR5_1: R5.1 U1.44 | length 80.7
  Top Layer w8: U1.44 444.53,265.47 R5.1
NetR6_2: R6.2 U1.3 | length 234.6
  Top Layer w8: U1.3 619.31,436.1 624,431.42 624,338.48 R6.2
NetR7_2: R7.2 U1.4 | length 214.6
  Top Layer w8: U1.4 628.3,455.79 642,442.09 642,365.48 R7.2
NetR8_2: R8.2 U1.5 | length 192.7
  Top Layer w8: U1.5 634.07,475.47 660,449.54 660,392.48 R8.2
NetR9_2: R9.2 U1.6 | length 170.7
  Top Layer w8: U1.6 639.84,495.16 687.8,447.2 R9.2
NetR18_2: R18.2 U5.17 | length 113.8
  Top Layer w8: R18.2 700,1060 745.32,1014.68 U5.17
NetR19_1: R19.1 U6.14 | length 95.4
  Top Layer w12: U6.14 R19.1
NetR20_1: R20.1 U1.18 | length 1328.9
  Top Layer w8: U1.18 425,664.61 425,1800 487.8,1862.8 R20.1
NetR21_2: R21.2 U1.29 | length 1573
  Top Layer w8: U1.29 v2(419.53,534.53) ; v2(455,1515) 455,1775 495,1815 R21.2
  Bottom Layer w8: v2(419.53,534.53) 455,570 v2(455,1515)
NetR22_2: R22.2 U1.32 | length 1587.9
  Top Layer w8: U1.32 v2(449.53,475.47) ; v2(483.9,1450) 483.9,1733.9 515,1765 R22.2
  Bottom Layer w8: v2(449.53,475.47) 483.9,509.84 v2(483.9,1450)
PA_EN: R22.1 U6.8 | length 184.7
  Top Layer w8: R22.1 659.45,1765 706.06,1811.61 U6.8
SOLAR+: Q1.3 SOLAR+.1 | length 452.9
  Top Layer w20: SOLAR+.1 1227.76,227.76 Q1.3
SPI1_CS: U1.12 U5.7 | length 748.1
  Top Layer w8: U1.12 839.37,613.27 1003,776.9 1003,942.46 970.14,975.32 U5.7
SPI1_MISO: U1.16 U5.2 | length 652.9
  Top Layer w8: U1.16 464.21,779.21 519.53,834.53 v2(520,834.53) ; v2(735,835) 780,835 836.93,891.93 U5.2
  Bottom Layer w8: v2(520,834.53) 520.24,834.76 779.76,834.76 779.53,835 v2(735,835)
SPI1_MOSI: U1.17 U5.20 | length 558.5
  Top Layer w8: U1.17 444.53,834.53 565.63,955.63 U5.20
SPI1_SCLK: U1.15 U5.1 | length 492.1
  Top Layer w8: U1.15 483.9,753.9 651.18,921.18 U5.1
SPI2_CS: U1.25 U4.8 | length 266.5
  Top Layer w8: U1.25 U4.8
SPI2_MISO: U1.27 U4.7 | length 402.2
  Top Layer w8: U4.7 235.86,835.86 175,775 175,590 191.1,573.9 U1.27
SPI2_MOSI: U1.28 U4.6 | length 433.4
  Top Layer w8: U4.6 216.17,841.17 155,780 155,585 185.79,554.21 U1.28
SPI2_SCLK: U1.26 U4.4 | length 456.7
  Top Layer w8: v2(115,855) 115,877.56 147.75,910.31 U4.4 ; v2(195,655) 195,600 201.42,593.58 U1.26
  Bottom Layer w8: v2(115,855) 115,735 v2(195,655)
SWCLK: P7.3 U1.37 | length 258.5
  Top Layer w8: U1.37 306.73,148.27 P7.3
SWDIO: P7.2 U1.34 | length 431
  Top Layer w8: P7.2 175,180 175,416.1 195,436.1 U1.34
USART1_RX: R11.1 U1.31 | length 86.2
  Top Layer w8: R11.1 197.87,495.16 U1.31
USART1_TX: R13.2 U1.30 | length 80
  Top Layer w8: R13.2 182.87,514.84 U1.30
VCC: C1.2 D3.1 Q1.2 R2.1 U2.4 U2.8 | length 436.5
  Top Layer w16: U2.4 v2(1320,1000) ; Q1.2 v2(1377.6,537.4) C1.2 ; v2(1410,1035) R2.1 ; v2(1470,600) U2.8 ; D3.1 v2(1580,720)
VCC_3V3: C8.2 C9.2 C10.2 C11.1 C12.1 C13.1 C15.2 C16.1 C17.1 C18.2 C34.2 L2.2 L3.1 L8.1 P7.1 R14.2 U1.1 U1.9 U1.24 U1.36 U1.48 U4.1 U4.14 | length 1580.4
  Top Layer w8: v2(85.08,1837.28) R14.2 ; U4.1 C15.2 C16.1 v2(184.19,1132.59) ; C13.1 254.68,329.13 v2(255.55,330) U1.36 ; U4.14 C17.1 C18.2 v2(255.55,1133.4) ; v2(280,695) 280,679.37 294.92,664.45 U1.24 C12.1 ; U1.48 535,345.55 542.95,337.6 C11.1 C11.1@544.92,265 ; C10.2 558.7,251.22 C11.1@544.92,265 ; U1.1 574.45,294.53 C11.1@544.92,265 ; U1.9 C9.2 C8.2
  Top Layer w12: C10.2 v2(615,215) ; C8.2 v2(810.79,554.21)
  Top Layer w20: L2.2 994.45,679.45 v3(1070,755) ; L8.1 v3(1485,1829.06) ; C34.2 v3(1460,1745) ; v3(1434.37,1280.63) L3.1
VCC_CC1101: C22.2 C23.1 C24.1 C25.1 C26.1 C27.1 C28.1 L3.2 U5.4 U5.9 U5.11 U5.14 U5.15 U5.18 | length 900.7
  Top Layer w8: v2(689.69,1024.69) C28.1 U5.18 ; C25.1 v2(765,1100) 765,1099.57 795.75,1068.82 U5.15 ; v2(750,1145.32) C24.1 795.75,1143.35 836.93,1102.17 U5.14 ; v2(855.63,839.69) C22.2 894.68,864.59 876.3,882.98 U5.4 ; U5.11 914.68,1068.82 950,1104.13 C26.1 v2(989.68,1145.32) ; U5.9 C27.1 1005.32,1030 v2(1030.31,1055)
  Top Layer w20: v3(1300.31,1339.69) C23.1 L3.2
VCC_CC1190: C35.2 C37.2 C39.2 C40.2 C41.2 L8.2 L9.2 L11.2 U6.15 U6.16 | length 725.6
  Top Layer w12: L11.2@933.07,2009.84 L11.2 932.91,2011.97 968.46,2047.52 v2(990,2047.52) 1012.48,2047.52 1032.28,2027.72 C39.2 ; U6.15 937.19,1863.14 964.43,1863.14 v2(989.69,1888.39) ; U6.16 v2(989.69,1888.39) ; C39.2@1032.13,2009.84 C39.2 ; v2(1075,2047.52) C40.2 ; v2(1086.61,1888.39) C37.2 v2(989.69,1888.39) ; L9.2 v2(1165,1789.69) ; v2(1160,2050) C41.2 C40.2 ; C39.2 C40.2
  Top Layer w20: v3(1278.94,1789.69) L8.2 ; v3(1278.94,1885) C35.2
pads on no net: U1.2 U1.10 U1.11 U1.33 U1.38 U1.39 U1.41 U1.42 U1.43 U1.45 U1.46 U3.D1 U3.D2 U4.2 U4.15 USB1.2 USB1.3 USB1.4 USB1.MH1 USB1.MH2 YA1.2 YA1.4

## Polygon pours and split planes (outlines as drawn)
GND on Top Layer "Top Layer-GND" (solid, remove dead copper, pour order 8): 410,1558.54 410,750 1298.87,750 1298.87,1030 1670,1030 1670,0 0,0 0,1558.54
AGND on Top Layer "Top Later-AGND" (solid, remove dead copper, pour order 2): 0,2720 0,1580 440,1580 440,760.63 1260,760.63 1260,1068.82 1670,1068.82 1670,2720
GND on Bottom Layer "Bottom Layer-GND" (solid, remove dead copper, pour order 12): 0,1559 395,1559 395,750 1298,750 1298,1030 1670,1030 1670,0 0,0
AGND on Bottom Layer "Bottom Layer-AGND" (solid, remove dead copper, pour order 10): 0,2720 0,1580 440,1580 440,760.63 1260,760.63 1260,1069 1670,1069 1670,2720
AGND on GND Plane (split plane): 1624.69,2699.62 1629.27,2698.52 1633.62,2696.72 1637.63,2694.26 1641.21,2691.21 1644.26,2687.63 1646.72,2683.62 1648.52,2679.27 1649.62,2674.69 1649.95,2670.51 1649.9,2670 1649.9,1055.1 1275.75,1055.1 1273.8,1054.71 1272.14,1053.6 1271.4,1052.86 1270.29,1051.2 1269.9,1049.25 1269.9,780.1 430.1,780.1 430.1,1315 430.1,1570 429.71,1571.95 428.6,1573.6 426.95,1574.71 425,1575.1 20.1,1575.1 20.1,2670 20.05,2670.5 20.38,2674.69 21.48,2679.27 23.28,2683.62 25.74,2687.63 28.79,2691.21 32.37,2694.26 36.38,2696.72 40.73,2698.52 45.31,2699.62 49.5,2699.95 50,2699.9 1620,2699.9 1620.51,2699.95
GND on GND Plane (split plane): 419.9,1315 419.9,775 420.29,773.05 421.4,771.4 423.05,770.29 425,769.9 1275,769.9 1276.95,770.29 1278.6,771.4 1279.71,773.05 1280.1,775 1280.1,1044.9 1649.9,1044.9 1649.9,50 1649.95,49.5 1649.62,45.31 1648.52,40.73 1646.72,36.38 1644.26,32.37 1641.21,28.79 1637.63,25.74 1633.62,23.28 1629.27,21.48 1624.69,20.38 1620.5,20.05 1620,20.1 50,20.1 49.5,20.05 45.31,20.38 40.73,21.48 36.38,23.28 32.37,25.74 28.79,28.79 25.74,32.37 23.28,36.38 21.48,40.73 20.38,45.31 20.05,49.5 20.1,50 20.1,1564.9 419.9,1564.9
VCC_3V3 on POWER Plane (split plane): 399.9,1777.89 399.9,1775 399.9,1525 399.9,775 400.29,773.05 401.4,771.4 403.05,770.29 405,769.9 875,769.9 876.95,770.29 878.6,771.4 1378.6,1271.4 1379.71,1273.05 1380.1,1275 1380.1,1777.89 1649.9,2047.69 1649.9,1110.1 1370,1110.1 1368.05,1109.71 1366.4,1108.6 1181.4,923.6 1180.29,921.95 1179.9,920 1179.9,642.56 1179.9,495.93 1072.58,388.6 991.4,307.42 871.4,187.42 870.29,185.77 869.9,183.82 869.9,20.1 50,20.1 49.5,20.05 45.31,20.38 40.73,21.48 36.38,23.28 32.37,25.74 28.79,28.79 25.74,32.37 23.28,36.38 21.48,40.73 20.38,45.31 20.05,49.5 20.1,50 20.1,2157.69
VCC_CC1190 on POWER Plane (split plane): 1624.69,2699.62 1629.27,2698.52 1633.62,2696.72 1637.63,2694.26 1641.21,2691.21 1644.26,2687.63 1646.72,2683.62 1648.52,2679.27 1649.62,2674.69 1649.95,2670.51 1649.9,2670 1649.9,2062.11 1371.4,1783.6 1370.29,1781.95 1369.9,1780 1369.9,1777.89 1369.9,1530.1 410.1,1530.1 410.1,1775 410.1,1780 409.71,1781.95 408.6,1783.6 20.1,2172.11 20.1,2670 20.05,2670.5 20.38,2674.69 21.48,2679.27 23.28,2683.62 25.74,2687.63 28.79,2691.21 32.37,2694.26 36.38,2696.72 40.73,2698.52 45.31,2699.62 49.5,2699.95 50,2699.9 1620,2699.9 1620.51,2699.95
VCC on POWER Plane (split plane): 1649.9,50 1649.95,49.5 1649.62,45.31 1648.52,40.73 1646.72,36.38 1644.26,32.37 1641.21,28.79 1637.63,25.74 1633.62,23.28 1629.27,21.48 1624.69,20.38 1620.5,20.05 1620,20.1 1315.1,20.1 1315.1,642.56 1314.71,644.51 1313.6,646.16 1311.95,647.27 1310,647.66 1190.1,647.66 1190.1,917.89 1372.11,1099.9 1649.9,1099.9
BAT+ on POWER Plane (split plane): 1304.9,20.1 880.1,20.1 880.1,181.71 998.6,300.21 1079.79,381.4 1188.6,490.21 1189.71,491.87 1190.1,493.82 1190.1,637.46 1304.9,637.46
VCC_CC1101 on POWER Plane (split plane): 1369.9,1519.9 1369.9,1277.11 872.89,780.1 410.1,780.1 410.1,1519.9

## Keep-outs
Keep-Out Layer:
  lines w10: 0,50 ccw(c50,50) 50,0 1620,0 ccw(c1620,50) 1670,50 1670,2670 ccw(c1620,2670) 1620,2720 50,2720 ccw(c50,2670) 0,2670 0,2650 0,50

## Other copper
Top Layer:
  pour cut-out: 804,1041
GND Plane (plane layer: these items are gaps in the copper):
  lines w10: 0,1570 425,1570 425,1315 425,775 1275,775 1275,1049.25 1275.75,1050 1670,1050
POWER Plane (plane layer: these items are gaps in the copper):
  rectangle: 843,982 870,1007